# Altium PCB PCB_bug_v2.PcbDoc
Units mil, origin at the board's own origin, x right, y up, seen from the top; angles counter-clockwise.
Board outline 2160.34 x 2509.44 mil, 2 copper layers (Top Layer, Bottom Layer); 72 components, 51 nets, 277 pads, 65 vias.
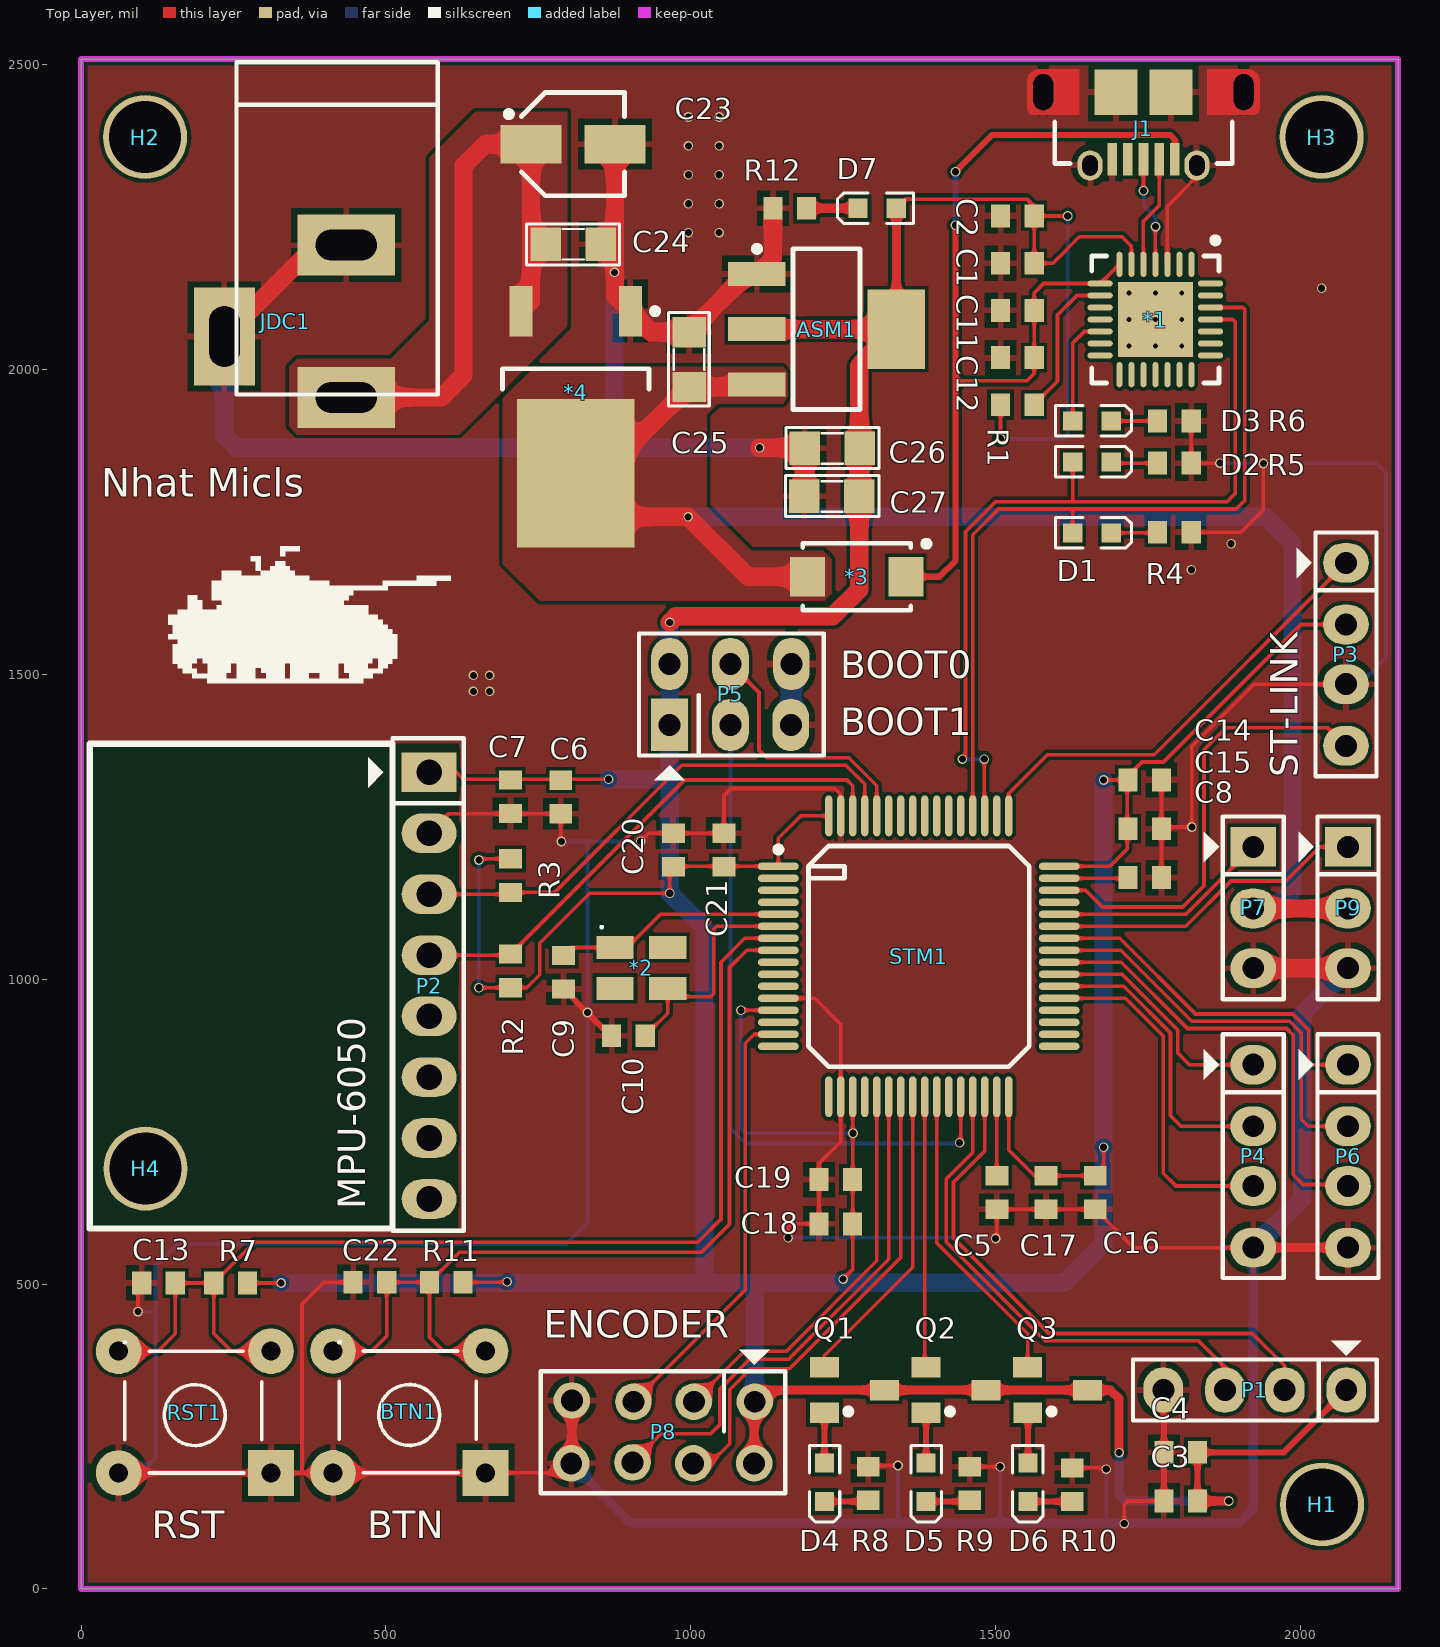
[diagram p0: Top Layer view]
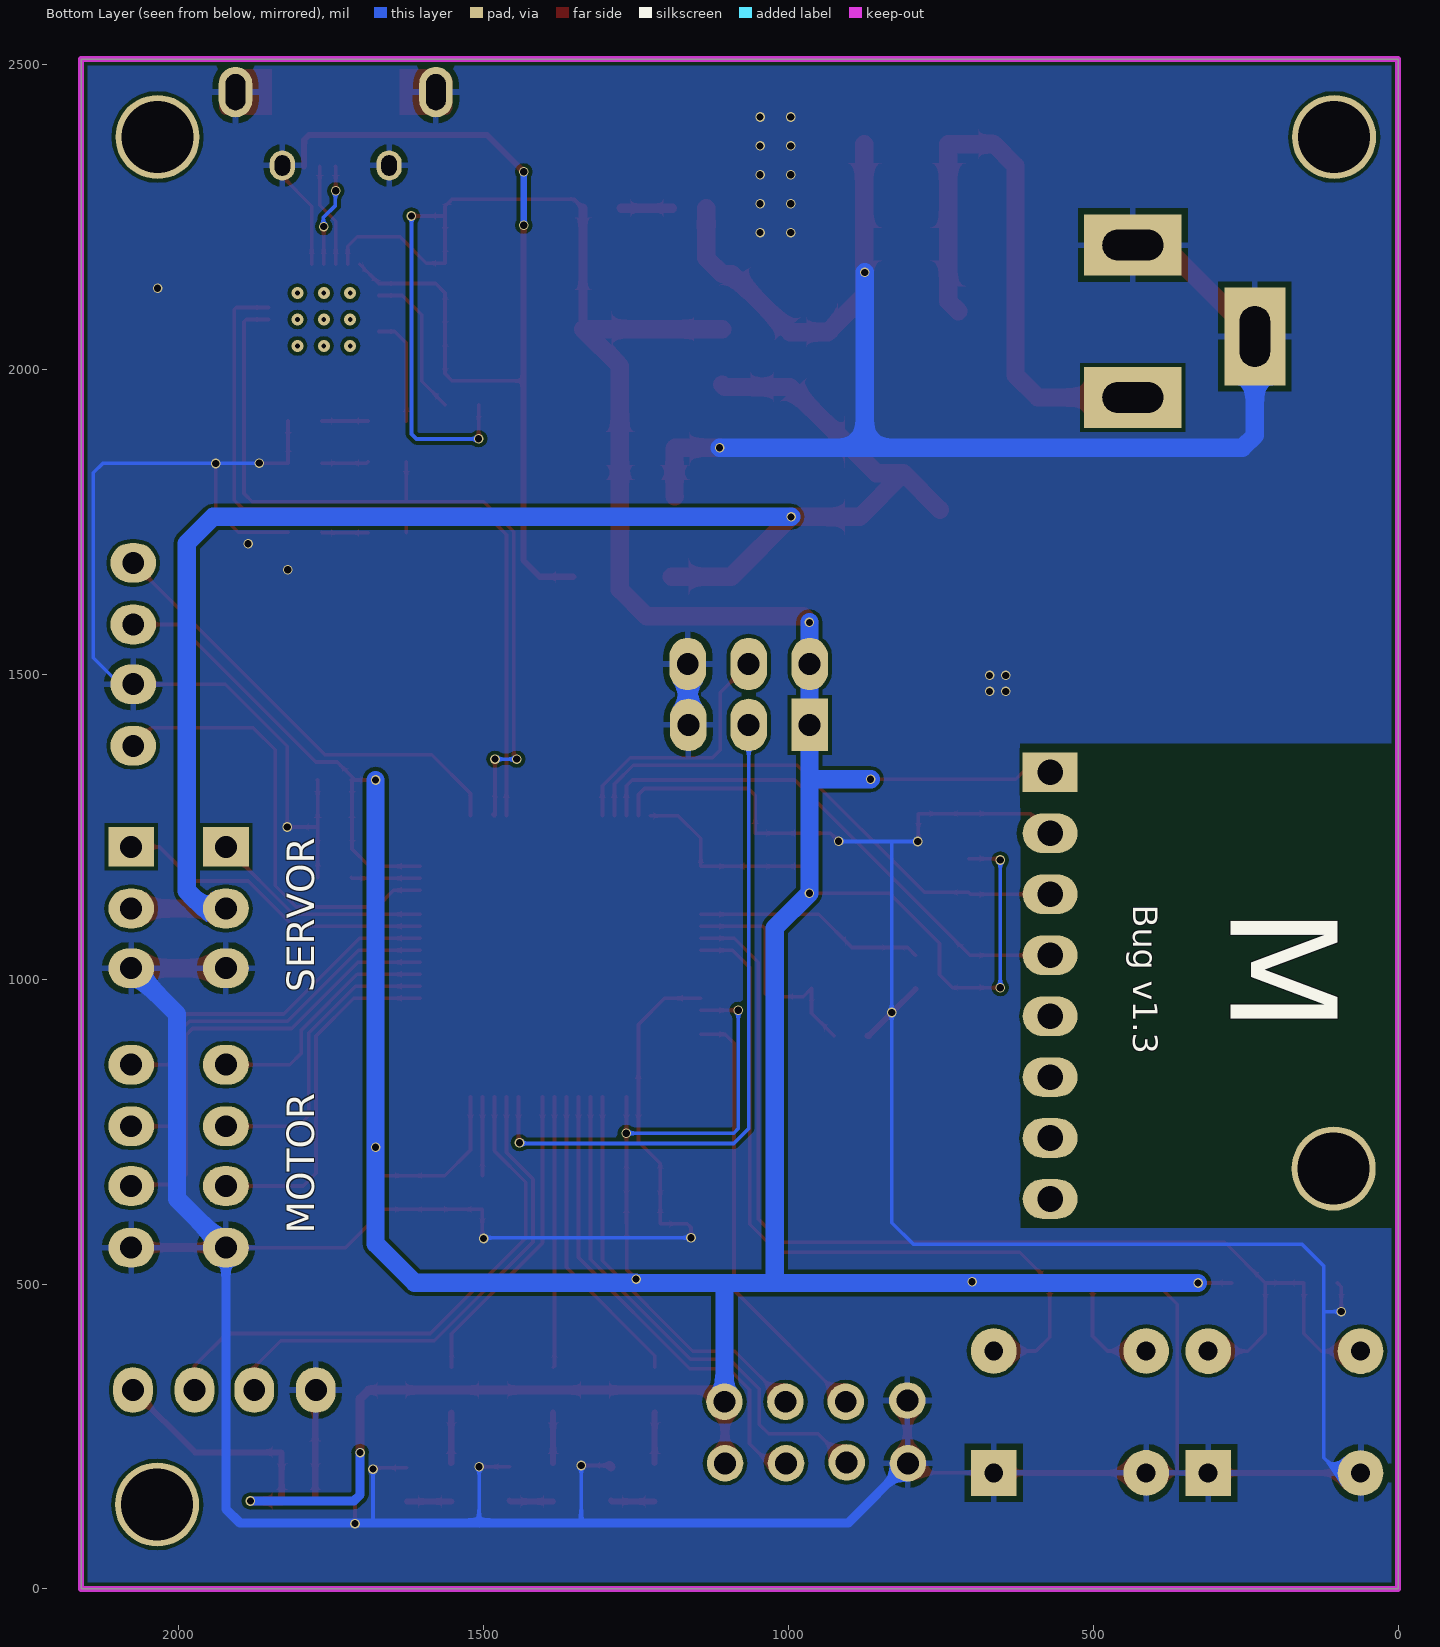
[diagram p1: Bottom Layer view, seen from below]
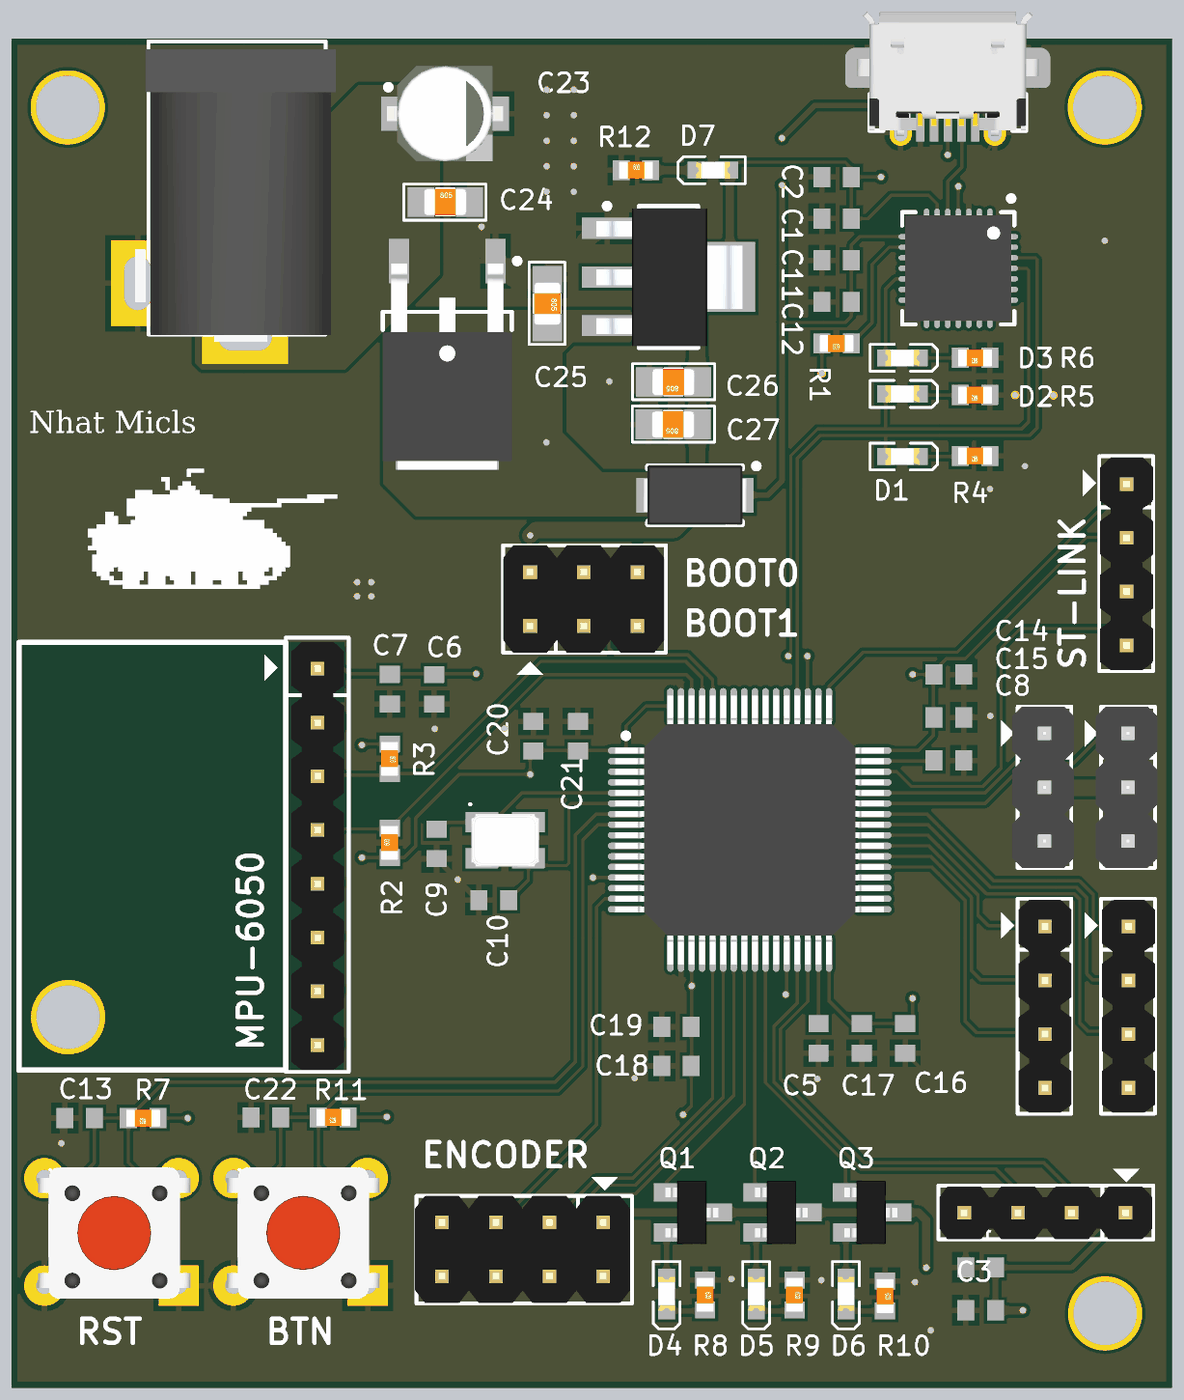
[diagram p2: 3D render of the assembled board from above, using the file's embedded part models]

## Layer stack, top to bottom
Top Solder: solder mask 0.4, Solder Resist, Dk 3.5
Top Layer: signal copper 1.4
Dielectric 1: dielectric 12.6, FR-4, Dk 4.8
Bottom Layer: signal copper 1.4
Bottom Solder: solder mask 0.4, Solder Resist, Dk 3.5

## Board outline
0,0 0,2509.44 2160.34,2509.44 2160.34,0

## Design rules (kind name [scope] priority, off if disabled: settings)
Clearance [All] p1: gap=6 ignorepadtopadclearanceinfootprint=FALSE
DiffPairsRouting [All] p1: maxlimit=10 minlimit=10 mostfreqgap=10 toplayer_minwidth=6 toplayer_maxwidth=30 toplayer_prefwidth=15 bottomlayer_minwidth=6 bottomlayer_maxwidth=30 bottomlayer_prefwidth=15 maxuncoupledlength=500
HoleToHoleClearance [All] p1: gap=6 allowstackedmicrovias=TRUE
MinimumSolderMaskSliver [All] p1: minsoldermaskwidth=6
PlaneConnect [All] p1: planeconnectstyle=Direct reliefexpansion=20 reliefentries=4 reliefconductorwidth=10 reliefairgap=10
PolygonConnect PolygonConnect_2 [InNet('Net*4_3') vs InNet('Net*4_3')] p1: connectstyle=Direct reliefconductorwidth=10 reliefentries=4 polygonreliefangle="90 Angle" airgapwidth=10
PolygonConnect PolygonConnect_1 [InNet('VCC_5V') vs InNet('VCC_5V')] p2: connectstyle=Direct reliefconductorwidth=10 reliefentries=4 polygonreliefangle="90 Angle" airgapwidth=10
PolygonConnect [All] p3: thpad.connectstyle=Relief thpad.reliefconductorwidth=10 thpad.reliefentries=4 thpad.polygonreliefangle="90 Angle" thpad.airgapwidth=10 smdpad.connectstyle=Relief smdpad.reliefconductorwidth=10 smdpad.reliefentries=4 smdpad.polygonreliefangle="90 Angle" smdpad.airgapwidth=10 via.connectstyle=Direct via.reliefconductorwidth=10 via.reliefentries=4 via.polygonreliefangle="90 Angle" via.airgapwidth=10
RoutingVias [All] p1: holewidth=28 width=50 viastyle="Through Hole" minholewidth=11.81 minwidth=15.75 maxholewidth=11.81 maxwidth=15.75
SilkToSilkClearance [All] p1: silktosilkclearance=6
SilkToSolderMaskClearance [IsPad] p1: minsilkscreentomaskgap=0 clearancetoexposedcopper=TRUE
SolderMaskExpansion [All] p1: expansion=0
Width [All] p1: maxlimit=30 minlimit=6 preferedwidth=15
24 further rules are at their usual default settings.

## Classes and differential pairs
differential pair D: +D_P -D_N

## Components (designator, comment, footprint, x,y, rotation, side; value= is the part's Value field where it differs from the comment)
*1 "CP2102" QFN50P500X500X90_HS-29N 1762.27,2082.32 r270 top
*2 "XTAL" "XTAL SMD 4PIN" 918.91,1018.58 r0 top
*3 "Diode" "DIODE SMA (DO-214AC)" 1272.31,1660.32 r0 top
*4 "LD1086" DPAK228P972X230-3N 811.3,1922.71 r270 top
ASM1 "LM1117" SOT223-4N 1222.78,2066.38 r0 top value=LM317
BTN1 "SW" "Tact SW 4 pin" 663.29,190.22 r180 top value="Button chip 4 pin"
C1 "Cap Non-Pol SMD" CAP-SM-0603 1535.84,2174.74 r180 top value=100nF
C2 "Cap Non-Pol SMD" CAP-SM-0603 1535.84,2252.17 r180 top value=10uF
C3 "Cap Non-Pol SMD" CAP-SM-0603 1803.81,144.15 r180 top value=100nF
C4 "Cap Non-Pol SMD" CAP-SM-0603 1803.81,224 r180 top value=10uF
C5 "Cap Non-Pol SMD" CAP-SM-0603 1502.22,650.14 r90 top value=100pF
C6 "Cap Non-Pol SMD" CAP-SM-0603 786.86,1299.06 r270 top value=100nF
C7 "Cap Non-Pol SMD" CAP-SM-0603 704.29,1299.47 r270 top value=10uF
C8 "Cap Non-Pol SMD" CAP-SM-0603 1744.68,1166.9 r180 top value=100pF
C9 "Cap Non-Pol SMD" CAP-SM-0603 791.43,1011.59 r90 top value=100pF
C10 "Cap Non-Pol SMD" CAP-SM-0603 897.78,907.28 r0 top value=100pF
C11 "Cap Non-Pol SMD" CAP-SM-0603 1535.84,2097.31 r180 top value=100nF
C12 "Cap Non-Pol SMD" CAP-SM-0603 1535.84,2019.88 r180 top value=10uF
C13 "Cap Non-Pol SMD" CAP-SM-0603 126.92,501.8 r180 top value=100nF
C14 "Cap Non-Pol SMD" CAP-SM-0603 1744.68,1326.94 r0 top value=100nF
C15 "Cap Non-Pol SMD" CAP-SM-0603 1744.68,1246.92 r0 top value=10uF
C16 "Cap Non-Pol SMD" CAP-SM-0603 1663.48,650.14 r270 top value=100nF
C17 "Cap Non-Pol SMD" CAP-SM-0603 1582.85,650.14 r270 top value=10uF
C18 "Cap Non-Pol SMD" CAP-SM-0603 1238,598.78 r180 top value=100nF
C19 "Cap Non-Pol SMD" CAP-SM-0603 1238,671.47 r180 top value=10uF
C20 "Cap Non-Pol SMD" CAP-SM-0603 971.63,1212.14 r90 top value=100nF
C21 "Cap Non-Pol SMD" CAP-SM-0603 1054.48,1212.14 r90 top value=10uF
C22 "Cap Non-Pol SMD" CAP-SM-0603 473.64,503.07 r180 top value=100nF
C23 "Cap Pol SMD" "CAP ALU SIZE B" 806.87,2370.04 r0 top value=100uF
C24 "Cap Non-Pol SMD" CAP-SM-0805 762.41,2205.75 r0 top value=100nF
C25 "Cap Non-Pol SMD" CAP-SM-0805 997.39,2061.61 r270 top value=100nF
C26 "Cap Non-Pol SMD" CAP-SM-0805 1277.06,1870.87 r180 top value=100nF
C27 "Cap Non-Pol SMD" CAP-SM-0805 1276.54,1792.05 r180 top value=10uF
D1 "LED SMD" LED_0603_Blue 1658.32,1732.24 r0 top
D2 "LED SMD" LED_0603_Blue 1658.32,1848.7 r0 top
D3 "LED SMD" LED_0603_Blue 1658.32,1915.89 r0 top
D4 "LED SMD" LED_0603_Blue 1219.48,174.82 r270 top
D5 "LED SMD" LED_0603_Blue 1386.1,174.82 r270 top
D6 "LED SMD" LED_0603_Blue 1553.22,174.82 r270 top
D7 "LED SMD" LED_0603_Blue 1305.79,2264.89 r180 top
H1 "Hole" "LO KHOAN 3MM" 2035.72,138.36 r0 top
H2 "Hole" "LO KHOAN 3MM" 104.92,2381.71 r0 top
H3 "Hole" "LO KHOAN 3MM" 2035.01,2381.71 r0 top
H4 "Hole" "LO KHOAN 3MM" 105.63,689.5 r0 top
J1 "629105150921" 629105150921 1742.71,2455.32 r180 top
JDC1 "Jack DC" DC-IN 335,2079.44 r270 top value="Jac DC"
P1 "Header 4" JP4 1975.34,326.17 r180 top
P2 "Header 8" JP8 570.8,1339.55 r270 top
P3 "Header 4" JP4 2074.89,1583.02 r270 top
P4 "Header 4" JP4 1922.82,759.85 r270 top
P5 "Header 3X2" JP3x2 1065.2,1467.22 r0 top
P6 "Header 4" JP4 2078.28,759.85 r270 top
P7 "Header 3" JP3 1922.82,1117.14 r270 top
P8 "Header 4X2" JP4x2 954.52,257.44 r180 top
P9 "Header 3" JP3 2078.28,1117.14 r270 top
Q1 "C1815" SOT23B 1268.43,326.05 r270 top
Q2 "C1815" SOT23B 1435.16,326.05 r270 top
Q3 "C1815" SOT23B 1601.9,326.05 r270 top
R1 "RESISTOR SMD" RES-SM-0603 1562.84,1942.45 r180 top value=4.7K
R2 "RESISTOR SMD" RES-SM-0603 704.31,986.76 r90 top value=10K
R3 "RESISTOR SMD" RES-SM-0603 704.29,1197.1 r270 top value=10K
R4 "RESISTOR SMD" RES-SM-0603 1820.4,1733.31 r180 top value=1K
R5 "RESISTOR SMD" RES-SM-0603 1820.4,1846.7 r180 top value=1K
R6 "RESISTOR SMD" RES-SM-0603 1820.4,1915.88 r180 top value=1K
R7 "RESISTOR SMD" RES-SM-0603 272.26,501.8 r180 top value=10K
R8 "RESISTOR SMD" RES-SM-0603 1291.29,199.82 r270 top value=1K
R9 "RESISTOR SMD" RES-SM-0603 1457.72,199.81 r270 top value=1K
R10 "RESISTOR SMD" RES-SM-0603 1625.96,197.85 r270 top value=1K
R11 "RESISTOR SMD" RES-SM-0603 625.98,503.07 r180 top value=10K
R12 "RESISTOR SMD" RES-SM-0603 1135.53,2264.89 r0 top value=1K
RST1 "SW" "Tact SW 4 pin" 311.47,190 r180 top value="Button chip 4 pin"
STM1 "STM32F405" CQFP50P1150X1150X160-64N 1374.08,1037.71 r0 top

## Footprints (in the part's own frame and the unit in brackets; to place one, negate y for a bottom-side part, rotate by r counter-clockwise, add the part's x,y. Pads: shape width x height; smd on the part's side, far side on the other; paste and mask are expansions set on the pad)
629105150921 [mm] "Micro USB 2.0 Type AB Horizontal"
  rect 0.4x1.35 smd: 1(-1.3,2.805) 2(-0.65,2.805) 3(0,2.805) 4(0.65,2.805) 5(1.3,2.805)
  round 0 / inner oval 1.4x2.1 / far side oval 1.4x2.1 hole 0.825 slot 1.5 at 90 deg: Shell(-4.175,0)
  oval 1.05x1.25 hole 0.65 slot 0.85 at 90 deg: Shell(-2.225,3.055) Shell(2.225,3.055)
  rect 1.8x1.9 smd: Shell(-1.15,0) Shell(1.15,0)
  round 0 / inner round 0 / far side oval 1.4x2.1 hole 0.825 slot 1.5 at 90 deg: Shell(4.175,0)
  Top Layer region: 4.353,-0.95 4.544,-0.912 4.706,-0.804 4.814,-0.641 4.852,-0.45 4.852,-0.45 4.852,0.65 4.83,0.765 4.765,0.862 4.667,0.927 4.553,0.95 4.553,0.95 2.668,0.95 2.668,-0.95
  Top Layer region: -4.353,-0.95 -4.544,-0.912 -4.706,-0.804 -4.814,-0.641 -4.852,-0.45 -4.852,-0.45 -4.852,0.65 -4.83,0.765 -4.765,0.862 -4.667,0.927 -4.553,0.95 -4.553,0.95 -2.668,0.95 -2.668,-0.95
  silkscreen extent -3.7,1.25 3.7,2.97, body extent -4.3,-2.64 4.3,3.23, height 2.76
"CAP ALU SIZE B" [mm] "Capacitor, Aluminium Electrolytric, 4.3mm L X 4.3mm W X 5.4mm H, IPC Medium Density"
  rect 2.55x1.6 smd: 1(-1.75,0) 2(1.75,0)
  silkscreen extent -2.8,-2.15 2.15,2.15, body extent -2.75,-2.25 2.75,2.25, height 5.7
CAP-SM-0603 [mm] "SMD Ceramic Capacitor Size 0603"
  rect 0.8x0.95 smd: 1(-0.7,0) 2(0.7,0)
  body extent -0.85,-0.45 0.85,0.45, height 0.6
CAP-SM-0805 [mil]
  rect 50x55 smd: 1(0,0) 2(90,0)
  silkscreen extent -32,-34 121,33, body extent 6,-25 84,25, height 31
CQFP50P1150X1150X160-64N [mm] "CQFP, 64-Leads, Body 11.50x11.50mm, Pitch 0.50mm, IPC Medium Density"
  oval 1.7x0.3 smd: 1(-5.85,3.75) 2(-5.85,3.25) 3(-5.85,2.75) 4(-5.85,2.25) 5(-5.85,1.75) 6(-5.85,1.25) 7(-5.85,0.75) 8(-5.85,0.25) 9(-5.85,-0.25) 10(-5.85,-0.75) 11(-5.85,-1.25) 12(-5.85,-1.75) 13(-5.85,-2.25) 14(-5.85,-2.75) 15(-5.85,-3.25) 16(-5.85,-3.75) 33(5.85,-3.75) 34(5.85,-3.25) 35(5.85,-2.75) 36(5.85,-2.25) 37(5.85,-1.75) 38(5.85,-1.25) 39(5.85,-0.75) 40(5.85,-0.25) 41(5.85,0.25) 42(5.85,0.75) 43(5.85,1.25) 44(5.85,1.75) 45(5.85,2.25) 46(5.85,2.75) 47(5.85,3.25) 48(5.85,3.75)
  oval 0.3x1.7 smd: 17(-3.75,-5.85) 18(-3.25,-5.85) 19(-2.75,-5.85) 20(-2.25,-5.85) 21(-1.75,-5.85) 22(-1.25,-5.85) 23(-0.75,-5.85) 24(-0.25,-5.85) 25(0.25,-5.85) 26(0.75,-5.85) 27(1.25,-5.85) 28(1.75,-5.85) 29(2.25,-5.85) 30(2.75,-5.85) 31(3.25,-5.85) 32(3.75,-5.85) 49(3.75,5.85) 50(3.25,5.85) 51(2.75,5.85) 52(2.25,5.85) 53(1.75,5.85) 54(1.25,5.85) 55(0.75,5.85) 56(0.25,5.85) 57(-0.25,5.85) 58(-0.75,5.85) 59(-1.25,5.85) 60(-1.75,5.85) 61(-2.25,5.85) 62(-2.75,5.85) 63(-3.25,5.85) 64(-3.75,5.85)
  silkscreen extent -5.97,-4.6 4.6,4.6, body extent -6.35,-6.35 6.35,6.35, height 1.53
DC-IN [mil] "Jac DC input"
  rect 100x160 hole 50 slot 100 at 90 deg: 1(125,100) 2(-125,100)
  rect 160x100 hole 50 slot 100 at 0 deg: 3(25,-100)
  silkscreen extent -425,-80 120,250, body extent -410,-105 134,269, height 434
"DIODE SMA (DO-214AC)" [mm]
  rect 1.45x1.65 smd: 1(-2.05,0) 2(2.05,0)
  silkscreen extent -2.25,-1.4 3.03,1.5, body extent -2.47,-1.4 2.47,1.4, height 2.3
DPAK228P972X230-3N [mm] "D-PAK, 3-Pads, Body 6.15x6.41mm (max), IPC Medium Density"
  rect 2.1x0.95 smd: 1(-4.4,2.28) 3(-4.4,-2.28)
  rect 6.2x4.9 smd: 4(2.35,0)
  silkscreen extent -4.52,-3.05 -1.15,3.43, body extent -4.27,-3.05 5.45,3.05, height 2.3
JP3 [mil] "Jumper 3"
  rect 65x75 hole 36: 1(-100,0)
  oval 65x75 hole 36: 2(1,0) 3(99,0)
  silkscreen extent -150,-81 150,50, body extent -150,-60 150,55, height 355
JP3x2 [mil] "Connector 3x2"
  rect 60x86 hole 36: 1(-100,-50)
  oval 60x86 hole 36: 2(0,-50) 3(99,-50) 4(-100,50) 5(0,50) 6(100,50)
  silkscreen extent -150,-141 153,100, body extent -150,-100 150,100, height 335
JP4 [mil] "Jumper 4"
  oval 65x75 hole 36: 1(-100,0) 2(1,0) 3(99,0) 4(200,0)
  silkscreen extent -150,-81 250,50, body extent -148,-48 248,50, height 323
JP4x2 [mil] "Connector 4x2"
  round 60 hole 36: 1(-150.5,-49.5) 2(-50.5,-49.5) 3(48.5,-49.5) 4(149.5,-51.5) 5(-149.5,51.5) 6(-49.5,51.5) 7(50,50) 8(150.5,51.5)
  silkscreen extent -200,-135 200,101, body extent -197,-100 203,100, height 335
JP8 [mil] "JP8"
  rect 65x90 hole 42: 1(0,0)
  oval 65x90 hole 42: 2(100,0) 3(200,0) 4(300,0) 5(400,0) 6(500,0) 7(600,0) 8(700,0)
  silkscreen extent -56,-100 752,57, body extent -48,-50 748,48, height 323
LED_0603_Blue [mm] "Chip LED, 2-Leads, Body 1.6x0.8mm, IPC Medium Density"
  rect 0.8x0.8 smd: 1(-0.8,0) 2(0.8,0)
  silkscreen extent -1.52,-0.64 1.65,0.64, body extent -0.8,-0.4 0.8,0.4, height 0.7
"LO KHOAN 3MM" [mil]
  round 138 hole 118.1: 1(0,0)
QFN50P500X500X90_HS-29N [mm] "QFN, 28-Leads, Body 5.00x5.00mm, Pitch 0.50mm, Thermal Pad 3.13x3.13mm, IPC Medium Density"
  oval 1.05x0.25 smd: 1(-2.3,1.5) 2(-2.3,1) 3(-2.3,0.5) 4(-2.3,0) 5(-2.3,-0.5) 6(-2.3,-1) 7(-2.3,-1.5) 15(2.3,-1.5) 16(2.3,-1) 17(2.3,-0.5) 18(2.3,0) 19(2.3,0.5) 20(2.3,1) 21(2.3,1.5)
  oval 0.25x1.05 smd: 8(-1.5,-2.3) 9(-1,-2.3) 10(-0.5,-2.3) 11(0,-2.3) 12(0.5,-2.3) 13(1,-2.3) 14(1.5,-2.3) 22(1.5,2.3) 23(1,2.3) 24(0.5,2.3) 25(0,2.3) 26(-0.5,2.3) 27(-1,2.3) 28(-1.5,2.3)
  rect 3.13x3.13 smd: 29(0,0)
  silkscreen extent -3.42,-2.65 2.65,2.65, body extent -2.52,-2.52 2.52,2.52, height 0.9
RES-SM-0603 [mm]
  rect 0.8x0.95 smd: 1(-0.014,0) 2(1.386,0)
  body extent -0.11,-0.4 1.49,0.4, height 0.3
SOT23B [mm] "SOT 23B"
  rect 0.85x1.2 smd: 1(0.94,-1.245) 2(0,1.25) 3(-0.95,-1.25)
  silkscreen extent 0.77,-0.38 1.02,-0.13, body extent -1.5,-1.3 1.5,1.2, height 1.06
SOT223-4N [mm] "SOT223, 4-Leads, Body 6.5x3.5mm, Pitch 2.3mm, Lead Span 7mm, IPC Medium Density"
  rect 2.4x1 smd: 1(-2.9,2.3) 2(-2.9,0) 3(-2.9,-2.3)
  rect 2.4x3.3 smd: 4(2.9,0)
  silkscreen extent -3.02,-3.35 1.4,3.47, body extent -3.39,-3.27 3.5,3.23, height 1.72
"Tact SW 4 pin" [mil] "SW button 4pin, 250 x250 mil"
  rect 75x75 hole 31: 1(0,0)
  round 75 hole 31: 2(250,-200) 3(250,0) 4(0,-200)
  silkscreen extent 15,-215 240,0, body extent -36,-220 276,24, height 276
"XTAL SMD 4PIN" [mm]
  rect 1.55x0.95 smd: 1(-1.1,0.85) 2(-1.1,-0.85) 3(1.1,-0.85) 4(1.1,0.85)
  silkscreen extent -1.7,1.65 -1.6,1.75, body extent -1.6,-1.25 1.6,1.25, height 0.55

## Part data
ASM1: "Available in 1.8V, 2.5V, 2.85V, 3.3V, 5V, and  Adjustable Versions"
BTN1 RST1: library part "Tact SW - 4Pin", "Switch button 4 pin"
C1 C2 C3 C4 C5 C6 C7 C8 C9 C10 C11 C12 C13 C14 C15 C16 C17 C18 C19 C20 C21 C22 C24 C25 C26 C27: "Capacitor"
C23: "Polarized Capacitor (Radial)"
D1 D2 D3 D4 D5 D6 D7: "LED"
H1 H2 H3 H4: "Hole 3mm"
J1: "Micro USB 2.0 Type AB Receptacle WR-COM, Horizontal, SMT", Contact Resistance="30 mOhm", Operating Temperature="-40 to 85 degC", Rated Current="1.8 A", Working Voltage="30 VAC", ComponentLink1Description=Manufacturer, ComponentLink1URL=http://www.we-online.de, ComponentLink2Description=Datasheet, ComponentLink2URL=https://katalog.we-online.de/em/datasheet/629105150921.pdf, Connector Type="Micro USB 2.0 Type AB", Gender=Receptacle, Mounting Technology=SMT, Orientation=Horizontal, Packaging="Tape and Reel", Part Number=629105150921, Published Date="September 2018", Publisher="Wurth Elektronik"
JDC1: "Jack DC input"
P1 P3 P4 P6: "Header, 4-Pin", LatestRevisionDate=17-Jul-2002, LatestRevisionNote="Re-released for DXP Platform.", Publisher="Altium Limited"
P2: "Header, 8-Pin", LatestRevisionDate=17-Jul-2002, LatestRevisionNote="Re-released for DXP Platform.", Publisher="Altium Limited"
P5: "Header, 3-Pin, Dual row", LatestRevisionDate=17-Jul-2002, LatestRevisionNote="Re-released for DXP Platform.", Publisher="Altium Limited"
P7 P9: "Header, 3-Pin", LatestRevisionDate=17-Jul-2002, LatestRevisionNote="Re-released for DXP Platform.", Publisher="Altium Limited"
P8: "Header, 4-Pin, Dual row", LatestRevisionDate=17-Jul-2002, LatestRevisionNote="Re-released for DXP Platform.", Publisher="Altium Limited"
Q1 Q2 Q3: "NPN Bipolar Transistor"
R1 R2 R3 R4 R5 R6 R7 R8 R9 R10 R11 R12: "Resistor"

## Via types
v1: diameter 15.75, hole 11.81, Top Layer to Bottom Layer, tented both sides, 53 vias
v2: diameter 19.68, hole 7.87, Top Layer to Bottom Layer, tented both sides, 9 vias
v3: diameter 15.75, hole 11.81, Top Layer to Bottom Layer, 3 vias

## Nets (pads, with @x,y where several pads share a name; then routed paths per layer and width w, separated by ;. In a path a pad name is that pad's centre, name@x,y a point inside that pad or via, vN(x,y) a via of type N, cw(c..) or ccw(c..) an arc to the next point about the centre after c; other vN are vias at no path point)
D_N: *1.5 J1.2 | length 171.5
  Top Layer w6: *1.5 1742.58,2243.67 1768.83,2269.92 J1.2@1768.83,2333.52
D_P: *1.4 J1.3 | length 162
  Top Layer w6: v1(1742.7,2293.41) 1742.7,2332.98 J1.3@1743.24,2333.52 ; *1.4 v1@1762.27,2226.92
  Bottom Layer w6: v1(1742.7,2293.41) 1743.24,2292.87 1743.24,2269.38 1762.96,2249.65 v1@1762.96,2234.16
  other v1: 1762.43,2234.7
GND: *1.3 *4.1 ASM1.1 BTN1.1 BTN1.3 C1.2 C2.2 C3.2 C4.2 C5.1 C6.2 C7.2 C8.1 C9.1 C10.1 C11.2 C12.2 C13.2 C14.2 C15.2 C16.2 C17.2 C18.2 C19.2 C20.2 C21.2 C22.2 C23.2 C24.2 C25.1 C26.2 C27.2 J1.5 J1.Shell JDC1.2 JDC1.3 P1.4 P2.2 P3.3 P4.4 P5.3 P5.6 P6.4 P7.3 P8.4 P8.8 P9.3 R4.1 R5.1 R6.1 R8.1 R9.1 R10.1 R12.1 RST1.1 RST1.3 STM1.12 STM1.18 STM1.63 | length 12844.5
  Top Layer w6: v1(93.23,454.86) 93.23,495.66 C13.2 ; RST1.1 360.19,190 ; BTN1.3 413.07,190 360.19,190 ; C22.2 398.48,503.07 362.26,466.85 362.26,192.07 360.19,190 ; P2.2 602.75,1271.5 C6.2 786.86,1226.87 v1(787.77,1225.96) ; BTN1.1 788.31,190.22 P8.8 ; v1(917.73,1226.54) 930.89,1239.7 C20.2 C21.2 1054.48,1301.48 1065.86,1312.86 1236.21,1312.86 1246.13,1302.94 STM1.63 ; STM1.12 1203.31,968.81 1246.13,926 STM1.18 1246.13,733.36 1210.44,697.67 C19.2 C18.2 1165.89,598.78 1159.81,592.71 v1(1159.81,576.08) ; R8.1@1293.32,202.4 v1(1340.05,202.4) ; R9.1 v1(1507.47,200.37) ; v1(1500.07,574.74) 1502.22,576.9 C5.1 C17.2 C16.2 1726.2,559.85 P4.4 ; R10.1 1679.63,198.41 v1(1681.53,196.5) ; v1(1711.13,106.99) 1711.13,138.02 1717.26,144.15 C3.2 ; C8.1 C15.2 ; C14.2@1772.51,1326.94 C14.2 C15.2 ; *1.3 1781.95,2268.31 1830.84,2317.19 J1.Shell@1830.84,2323.68 ; R4.1 1902.76,1733.31 1939.4,1769.95 v3(1939.4,1846.09) ; R6.1 R5.1 v3(1868.18,1846.7) ; P3.3 1923.98,1484.02 1822.13,1382.17 v1(1822.13,1249.76) 1775.07,1249.76 C15.2
  Top Layer w10: RST1.3 RST1.1 ; BTN1.3 BTN1.1 ; C9.1 830.34,945.13 868.19,907.28 C10.1 ; P1.4 1776.25,325.26 C3.2
  Top Layer w15: P8.8 805.02,206.94 P8.4 ; R8.1 R8.1@1293.32,202.4 ; P4.4 P6.4
  Top Layer w30: JDC1.3 385,2204.44 JDC1.2 ; C23.2 875.76,2121.24 *4.1 935.39,2061.61 C25.1 1092.72,2156.94 ASM1.1 1134.97,2183.31 R12.1 ; v1(1112.94,1872.01) 1185.92,1872.01 C26.2 1187.06,1792.57 C27.2 ; P7.3 P9.3
  Bottom Layer w6: RST1.3 96.94,190 121.87,214.93 121.87,454.8 ; v1(93.23,454.86) 121.8,454.86 ; v1(787.77,1225.96) 831.77,1225.96 ; v1(917.73,1226.54) 917.16,1225.96 831.77,1225.96 ; v1(1159.81,576.08) 1498.73,576.08 v1(1500.07,574.74) ; 1340.05,108.03 v1(1340.05,202.4) ; 1507.5,108.03 v1(1507.47,200.37) ; 1679.67,106.63 1680.99,107.95 1681.53,108.5 v1(1681.53,196.5) ; 1742.7,108.03 1742.78,107.95 ; v3(1868.18,1846.7) 2124.59,1846.7 2140.52,1830.76 2140.52,1527.64 2096.9,1484.02 P3.3 ; 121.8,454.86 121.87,454.86 ; 121.8,454.86 121.87,454.8 ; 121.87,454.8 121.87,454.86 ; 121.87,454.86 121.87,529.56 157.85,565.54 795.49,565.54 830.69,600.74 v1(830.69,945.48) 830.69,1224.89 831.77,1225.96
  Bottom Layer w15: P8.8 901.92,108.03 1340.05,108.03 1507.5,108.03 1681.04,108.03 1680.96,107.95 ; 1680.99,107.95 1742.78,107.95 ; 1742.7,108.03 1899.8,108.03 1922.82,131.05 P4.4
  Bottom Layer w30: JDC1.3 235,1892.35 255.34,1872.01 874.96,1872.01 ; v1(874.96,2159.65) 874.96,1872.01 ; v1(1112.94,1872.01) 874.96,1872.01 ; P5.3 1165.2,1418.22 P5.6 ; P4.4 2002.97,640 2002.97,942.83 P9.3
  other v1: 643.45,1472.22 669.98,1472.22 643.45,1498.53 669.98,1498.53 1821.39,1671.9 1886.45,1714.44 2034.9,2133.75 996.18,2224.86 1046.62,2224.86 996.18,2272.26 1046.62,2272.26 996.18,2319.66 1046.62,2319.66 996.18,2367.07 1046.62,2367.07 996.18,2414.47 1046.62,2414.47
LED_G: Q3.3 STM1.26 | length 505.7
  Top Layer w6: STM1.26 1403.61,567.53 1552.68,418.45 Q3.3
LED_R: Q1.3 STM1.24 | length 504
  Top Layer w6: Q1.3 1219.22,382.5 1364.24,527.52 STM1.24
LED_Y: Q2.3 STM1.25 | length 444.8
  Top Layer w6: STM1.25 1383.92,365.48 Q2.3
Net*1_9: *1.9 R1.1 | length 246.5
  Top Layer w6: R1.1 1601.8,1980.85 1601.8,2089.94 1633.55,2121.69 *1.9
Net*1_12: *1.12 D3.1 | length 180.5
  Top Layer w6: D3.1 1626.82,2043.67 1645.79,2062.63 *1.12
Net*1_25: *1.25 D2.1 STM1.51 | length 1366.8
  Top Layer w6: v1(1445.74,1361.13) 1450.66,1366.05 1450.66,1734.03 1500.01,1783.38 1626.25,1783.38 ; v1(1481.45,1361.13) 1481.45,1268.92 STM1.51 1484.75,1270.43 STM1.51@1483.74,1271.44 ; D2.1 1626.82,1783.95 1626.25,1783.38 ; *1.25 1889.42,2082.32 1893.19,2078.56 1893.19,1796.72 1879.85,1783.38 1626.25,1783.38
  Bottom Layer w6: v1(1445.74,1361.13) v1(1481.45,1361.13)
Net*1_26: *1.26 D1.1 STM1.52 | length 1340.9
  Top Layer w6: STM1.52 1462.66,1729.06 1504.98,1771.38 1627.15,1771.38 ; D1.1 1626.82,1771.05 1627.15,1771.38 ; *1.26 1905.77,2102 1909.09,2098.69 1909.09,1785.65 1894.82,1771.38 1627.15,1771.38
Net*2_1: *2.1 C9.2 STM1.5 | length 380.3
  Top Layer w6: C9.2 804.32,1052.04 *2.1 895.7,1052.04 950.27,1106.61 STM1.5
Net*2_3: *2.3 C10.2 STM1.6 | length 390.3
  Top Layer w6: C10.2 962.22,944.15 *2.3 975.78,971.54 1032.95,971.54 1037.62,976.21 1037.62,1082.39 1042.15,1086.92 STM1.6
Net*4_3: *4.3 C23.1 C24.1 JDC1.1 | length 957.2
  Top Layer w30: JDC1.1 590.95,1954.44 627.41,1990.9 627.41,2334.37 663.07,2370.04 C23.1 737.97,2112.38 *4.3
NetBTN1_2: BTN1.2 BTN1.4 C22.1 R11.2 STM1.8 | length 1492.8
  Top Layer w6: BTN1.2 476.7,390.22 501.2,414.73 C22.1 R11.2 ; BTN1.4 594.09,390.22 571.42,412.89 R11.2 ; STM1.8 1091.73,1047.55 1063.56,1019.38 1063.56,598.02 1017.73,552.19 620.54,552.19 R11.2
NetC5_2: C5.2 STM1.31 | length 129.8
  Top Layer w6: STM1.31 1502.03,677.89 C5.2
NetC8_2: C8.2 STM1.47 | length 113.2
  Top Layer w6: STM1.47 1715.88,1165.66 C8.2
NetC13_1: C13.1 R7.2 RST1.2 RST1.4 STM1.7 | length 1847.1
  Top Layer w6: RST1.2 126.19,390 154.48,418.3 C13.1 R7.2 ; RST1.4 246.74,390 217.7,419.05 R7.2 ; STM1.7 1088.79,1067.24 1049.62,1028.07 1049.62,606.7 1011.42,568.5 284.4,568.5 R7.2
NetD1_2: D1.2 R4.2 | length 76.5
  Top Layer w6: D1.2 1764.77,1732.24 R4.2
NetD2_2: D2.2 R5.2 | length 76.9
  Top Layer w6: D2.2 1691.82,1846.7 R5.2
NetD3_2: D3.2 R6.2 | length 76
  Top Layer w6: D3.2 R6.2
NetD4_1: D4.1 Q1.1 | length 82.8
  Top Layer w10: Q1.1 1219.48,289 D4.1
NetD4_2: D4.2 R8.2 | length 72.6
  Top Layer w10: D4.2 1289.36,143.33 R8.2
NetD5_1: D5.1 Q2.1 | length 82.8
  Top Layer w10: D5.1 1386.16,206.38 Q2.1
NetD5_2: D5.2 R9.2 | length 72.4
  Top Layer w10: D5.2 1455.8,143.33 R9.2
NetD6_1: D6.1 Q3.1 | length 82.9
  Top Layer w10: Q3.1 1553.22,288.72 D6.1
NetD6_2: D6.2 R10.2 | length 72.7
  Top Layer w10: D6.2 1625.92,143.33 R10.2
NetD7_2: D7.2 R12.2 | length 84.2
  Top Layer w15: R12.2 D7.2
NetP1_2: P1.2 STM1.30 | length 922.8
  Top Layer w6: STM1.30 1482.35,718.43 1431.15,667.23 1431.15,575.39 1587.65,418.9 1921.24,418.9 1974.34,365.8 P1.2
NetP1_3: P1.3 STM1.29 | length 836.1
  Top Layer w6: STM1.29 1462.66,715.71 1419.15,672.2 1419.15,568.95 1581.21,406.9 1833.03,406.9 1876.34,363.59 P1.3
NetP2_3: P2.3 R3.2 STM1.61 | length 867.5
  Top Layer w6: P2.3 701.31,1139.55 R3.2 776.64,1142.54 985.42,1351.31 1254.46,1351.31 1285.5,1320.28 STM1.61
NetP2_4: P2.4 R2.2 STM1.62 | length 867.3
  Top Layer w6: P2.4 702.54,1039.55 R2.2 989.84,1326.86 1256.29,1326.86 1265.81,1317.34 STM1.62
NetP4_1: P4.1 STM1.39 | length 402
  Top Layer w6: STM1.39 1707.62,1008.18 1798.98,916.82 1798.98,878.98 1818.11,859.85 P4.1
NetP4_2: P4.2 STM1.38 | length 493.1
  Top Layer w6: STM1.38 1710.33,988.5 1786.98,911.85 1786.98,776.07 1804.2,758.85 P4.2
NetP4_3: P4.3 STM1.37 | length 577.8
  Top Layer w6: STM1.37 1713.04,968.81 1774.98,906.88 1774.98,681.94 1796.07,660.85 P4.3
NetP5_2: P5.2 STM1.28 | length 1125
  Top Layer w6: v1(1441.15,731.76) 1442.98,733.59 STM1.28
  Bottom Layer w6: P5.2 1065.2,755.24 1089.8,730.64 1440.03,730.64 v1(1441.15,731.76)
NetP5_5: P5.5 STM1.60 | length 427.5
  Top Layer w6: P5.5 1111.99,1470.43 1111.99,1376.02 1124.7,1363.31 1259.43,1363.31 1305.18,1317.56 STM1.60
NetP6_1: P6.1 STM1.42 | length 589.9
  Top Layer w6: STM1.42 1703.85,1067.24 1827.95,943.14 1987.44,943.14 2013.64,916.94 2013.64,865.49 2019.27,859.85 P6.1
NetP6_2: P6.2 STM1.41 | length 676.5
  Top Layer w6: STM1.41 1705.33,1047.55 1821.75,931.14 1982.47,931.14 2001.64,911.97 2001.64,770.21 2012.99,758.85 P6.2
NetP6_3: P6.3 STM1.40 | length 761.4
  Top Layer w6: STM1.40 1706.31,1027.87 1815.04,919.14 1977.5,919.14 1988.34,908.29 1988.34,679.38 2004.44,663.28 2078.28,663.28 P6.3
NetP7_1: P7.1 STM1.44 | length 364.2
  Top Layer w6: STM1.44 1812.29,1106.61 P7.1
NetP8_2: P8.2 STM1.21 | length 665.2
  Top Layer w6: P8.2 1087.99,389.91 1156.93,389.91 1305.18,538.16 STM1.21
NetP8_3: P8.3 STM1.15 | length 724.6
  Top Layer w6: P8.3 1089.42,490.34 1089.42,895.15 1104.03,909.76 STM1.15
NetP8_6: P8.6 STM1.23 | length 796.2
  Top Layer w6: P8.6 1031.79,205.94 1063.83,237.98 1063.83,326.82 1097.95,360.94 1161.9,360.94 1344.55,543.59 STM1.23
NetP8_7: P8.7 STM1.22 | length 859
  Top Layer w6: P8.7 951.37,254.28 1032.46,254.28 1047.83,269.66 1047.83,327.79 1096.98,376.94 1160.93,376.94 1324.87,540.88 STM1.22
NetP9_1: P9.1 STM1.43 | length 527.8
  Top Layer w6: STM1.43 1811.9,1086.92 1886.2,1161.23 1975.95,1161.23 2031.86,1217.14 P9.1
NetSTM1_33: STM1.33
SWCLK: P3.1 STM1.49 | length 746.7
  Top Layer w6: STM1.49 1521.72,1304.88 1585.28,1368.45 1760.31,1368.45 P3.1
SWDIO: P3.4 STM1.46 | length 746.5
  Top Layer w6: STM1.46 1647.79,1145.98 1675.16,1118.61 1807.32,1118.61 1842.03,1153.32 1842.03,1376.58 1877.83,1412.38 2045.53,1412.38 P3.4
VCC_3.3V: *1.6 ASM1.2 ASM1.4 C1.1 C2.1 C3.1 C4.1 C6.1 C7.1 C14.1 C15.1 C16.1 C17.1 C18.1 C19.1 C20.1 C21.1 C26.1 C27.1 D7.1 P1.1 P2.1 P3.2 P5.1 P5.4 P8.1 P8.5 Q1.2 Q2.2 Q3.2 R1.2 R2.1 R3.1 R7.1 R11.1 STM1.1 STM1.13 STM1.19 STM1.32 STM1.48 STM1.64 | length 10587.7
  Top Layer w6: R7.1 v1(328.08,501.8) ; P2.1 615.85,1339.55 627.19,1328.21 v1(865.2,1328.21) ; R11.1 697.92,503.07 v1(698.79,503.95) ; v1(652.46,986.2) R2.1 731.07,986.2 752.23,1007.36 752.23,1059.05 834.33,1141.15 v1(965.67,1141.15) 965.67,1178.62 C20.1 972.39,1185.35 STM1.1 1143.76,1231.15 1180.64,1268.03 STM1.64 ; v1(652.46,1195.65) 654.46,1197.65 R3.1 ; v1(1082.39,949.13) STM1.13 ; v1(1249.95,508.23) 1265.56,523.84 C18.1 1265.81,599.03 v1@1265.81,747.52 ; v1@1265.81,748.43 STM1.19 ; v1(1266.21,747.52) v1@1267.12,748.43 ; D7.1 1352.27,2279.87 1551.76,2279.87 1563.4,2268.24 C2.1 ; v3(1508.28,1886.73) R1.2 ; STM1.32 1521.72,719.85 1563.87,677.7 C17.1 C16.1 1677.29,691.51 v1(1677.29,724.6) ; STM1.48 1687.61,1185.35 1715.97,1213.7 1715.97,1325.79 C14.1 C14.1@1710.71,1326.94 ; v1(1618.5,2252.17) C2.1 ; v1(1677.29,1326.94) C14.1@1710.71,1326.94 ; *1.6 1722.9,2202.52 1707.44,2217.97 1637.38,2217.97 1594.15,2174.74 C1.1 C2.1 ; P3.2 2001.17,1582.02 1775.6,1356.45 1740.21,1356.45 C14.1@1710.71,1326.94
  Top Layer w10: C3.1 C4.1 1973.17,224 P1.1
  Top Layer w15: P8.5 1104.02,305.94 P8.1 1124.13,326.05 Q1.2 Q2.2 Q3.2 1688.5,326.05 1702.69,311.85 v1(1702.69,223.54) ; ASM1.4 1337.29,2066.72 D7.1 ; C3.1 v1(1882.66,144.15)
  Top Layer w30: v1(965.67,1585.52) 975.63,1595.48 1232.82,1595.48 1276.54,1639.2 C27.1 1276.54,2005.97 ASM1.4 ASM1.2
  Bottom Layer w6: v1(652.46,986.2) v1(652.46,1195.65) ; v1(1082.39,949.13) 1082.39,755.02 1089.89,747.52 v1(1266.21,747.52) ; v3(1508.28,1886.73) 1507.8,1886.25 1610.27,1886.25 1618.5,1894.48 v1(1618.5,2252.17)
  Bottom Layer w15: v1(1702.69,223.54) 1702.91,223.33 1702.91,187.65 1702.69,187.43 1702.69,154.41 1712.96,144.15 v1(1882.66,144.15)
  Bottom Layer w30: v1(328.08,501.8) 1020.38,501.8 ; v1(865.2,1328.21) 948.17,1328.21 ; v1(965.67,1585.52) v1(965.67,1141.15) 1022.6,1084.23 1022.6,504.02 1020.38,501.8 ; P8.1 1105.02,501.8 ; v1(1677.29,1326.94) v1(1677.29,724.6) 1677.29,566.36 1613.31,502.38 1249.96,501.96 1105.02,501.8 ; 1020.38,501.8 1105.02,501.8
VCC_5V: *3.1 *4.4 ASM1.3 C25.2 P7.2 P9.2 | length 2704.8
  Top Layer w30: *4.4@751.25,1770.15 *4.4 ; ASM1.3 1104.38,1971.61 C25.2 855.97,1830.19 *4.4 ; *3.1 1093.85,1660.32 v1(995.65,1758.53) 882.97,1758.53 *4.4 ; P7.2 P9.2
  Bottom Layer w30: v1(995.65,1758.53) 1943.74,1758.53 1987.27,1715 1987.27,1144.83 1958.58,1116.14 P7.2
VCC_5V_USB: *1.7 *1.8 *3.2 C11.1 C12.1 J1.1 | length 1588.2
  Top Layer w6: 1434.44,1981.59 1551.42,1981.59 1563.4,1993.57 C12.1 C11.1 1563.4,2125.98 1578.79,2141.37 *1.8 *1.7
  Top Layer w10: *3.2 1407.94,1660.32 1434.44,1686.82 1434.44,1981.59 1434.44,2237.18 v1(1434.28,2237.02) ; v1(1434.28,2324.72) 1494.59,2385.04 1786.39,2385.04 1794.42,2377.01 J1.1@1794.42,2333.52
  Bottom Layer w10: v1(1434.28,2237.02) v1(1434.28,2324.72)
pads on no net: *1.1 *1.2 *1.10 *1.11 *1.13 *1.14 *1.15 *1.16 *1.17 *1.18 *1.19 *1.20 *1.21 *1.22 *1.23 *1.24 *1.27 *1.28 *1.29 *2.2 *2.4 H1.1 H2.1 H3.1 H4.1 J1.4 P2.5 P2.6 P2.7 P2.8 STM1.2 STM1.3 STM1.4 STM1.9 STM1.10 STM1.11 STM1.14 STM1.16 STM1.17 STM1.20 STM1.27 STM1.34 STM1.35 STM1.36 STM1.45 STM1.50 STM1.53 STM1.54 STM1.55 STM1.56 STM1.57 STM1.58 STM1.59
copper on no net:
  other v2: 1718.96,2039.01 1762.27,2039.01 1805.57,2039.01 1718.96,2082.32 1762.27,2082.32 1805.57,2082.32 1718.96,2125.62 1762.27,2125.62 1805.57,2125.62

## Polygon pours and split planes (outlines as drawn)
GND on Top Layer "GND_L01_P002" (solid, remove dead copper, pour order 2): 0,0 0,2509.44 2160.34,2509.44 2160.34,0
Net*4_3 on Top Layer "NET*4_3_L01_P000" (solid, pour order 0): 512.09,2022.02 517.05,2026.98 571.19,2081.12 571.19,2347.7 578.02,2354.52 646.89,2423.39 797.66,2423.39 797.66,2071.28 620.01,1893.62 592.98,1893.62 354.91,1893.62 341.4,1907.13 341.4,2004.67 354.91,2018.18 508.25,2018.18
VCC_5V on Top Layer "VCC_5V_L01_P001" (solid, pour order 1): 1026.24,1775.93 1099.15,1703.02 1217.52,1703.02 1231.32,1689.22 1231.32,1632.7 1230.46,1632.7 1218.8,1621.04 752.08,1621.04 691.95,1681.18 691.95,1953.12 743.88,2004.56 1151.49,2004.56 1159.12,1994.32 1159.12,1956.51 1151.49,1944.35 1044.52,1944.35 1026.24,1926.07
GND on Bottom Layer "GND_L02_P005" (solid, remove dead copper, pour order 5): 0,0 0,2509.44 2160.34,2509.44 2160.34,0

## Keep-outs
Keep-Out Layer:
  the board outline again, w10

## Other copper
Top Layer:
  pour cut-out: 620.32,1386.82 0.71,1386.82 0.71,591.28 619.36,591.28
  region: 791.43,1039.15
Bottom Layer:
  pour cut-out: 620.32,1386.82 0.71,1386.82 0.71,591.28 619.36,591.28
  region net GND: 121.87,443.84

## Silkscreen, mask and mechanical layers (free items; w line width, h text height)
Top Overlay:
  region: 97 vertices and 7 holes, not listed, extent 142.61,1485.95 606.61,1693.95
  region: 358.61,1701.95 334.61,1701.95 334.61,1693.95 326.61,1693.95 326.61,1709.95 358.61,1709.95
  lines w10: 14.07,590.99 14.07,1386.42 510.8,1386.42 510.8,590.99 14.07,590.99
  text "Nhat Micls" at 32.78,1776.33 h80
  text "BOOT0" at 1245.32,1493.64 h45
  text "BOOT1" at 1245.32,1400.72 h45
  text "ST-LINK" at 1996.09,1331.55 h45 r90
  text "MPU-6050" at 466.43,622.73 h45 r90
  text "ENCODER" at 758.94,411.64 h45
  text "RST" at 115.8,83.29 h45
  text "BTN" at 468.95,83.29 h45
Bottom Overlay:
  text "Bug v1.3" at 434.03,1122.47 h40 r90
  text "M" at 331.82,1118.81 h300 r90
  text "SERVOR" at 1777.97,979.07 h45 r270
  text "MOTOR" at 1777.97,582.44 h45 r270

## Text inside footprints (layer, text, board x,y; h text height)
J1: Mechanical 2 "PCB Edge" at 1786.02,2534.06 h35 r180